# Allegro board 4PROJECT.brd
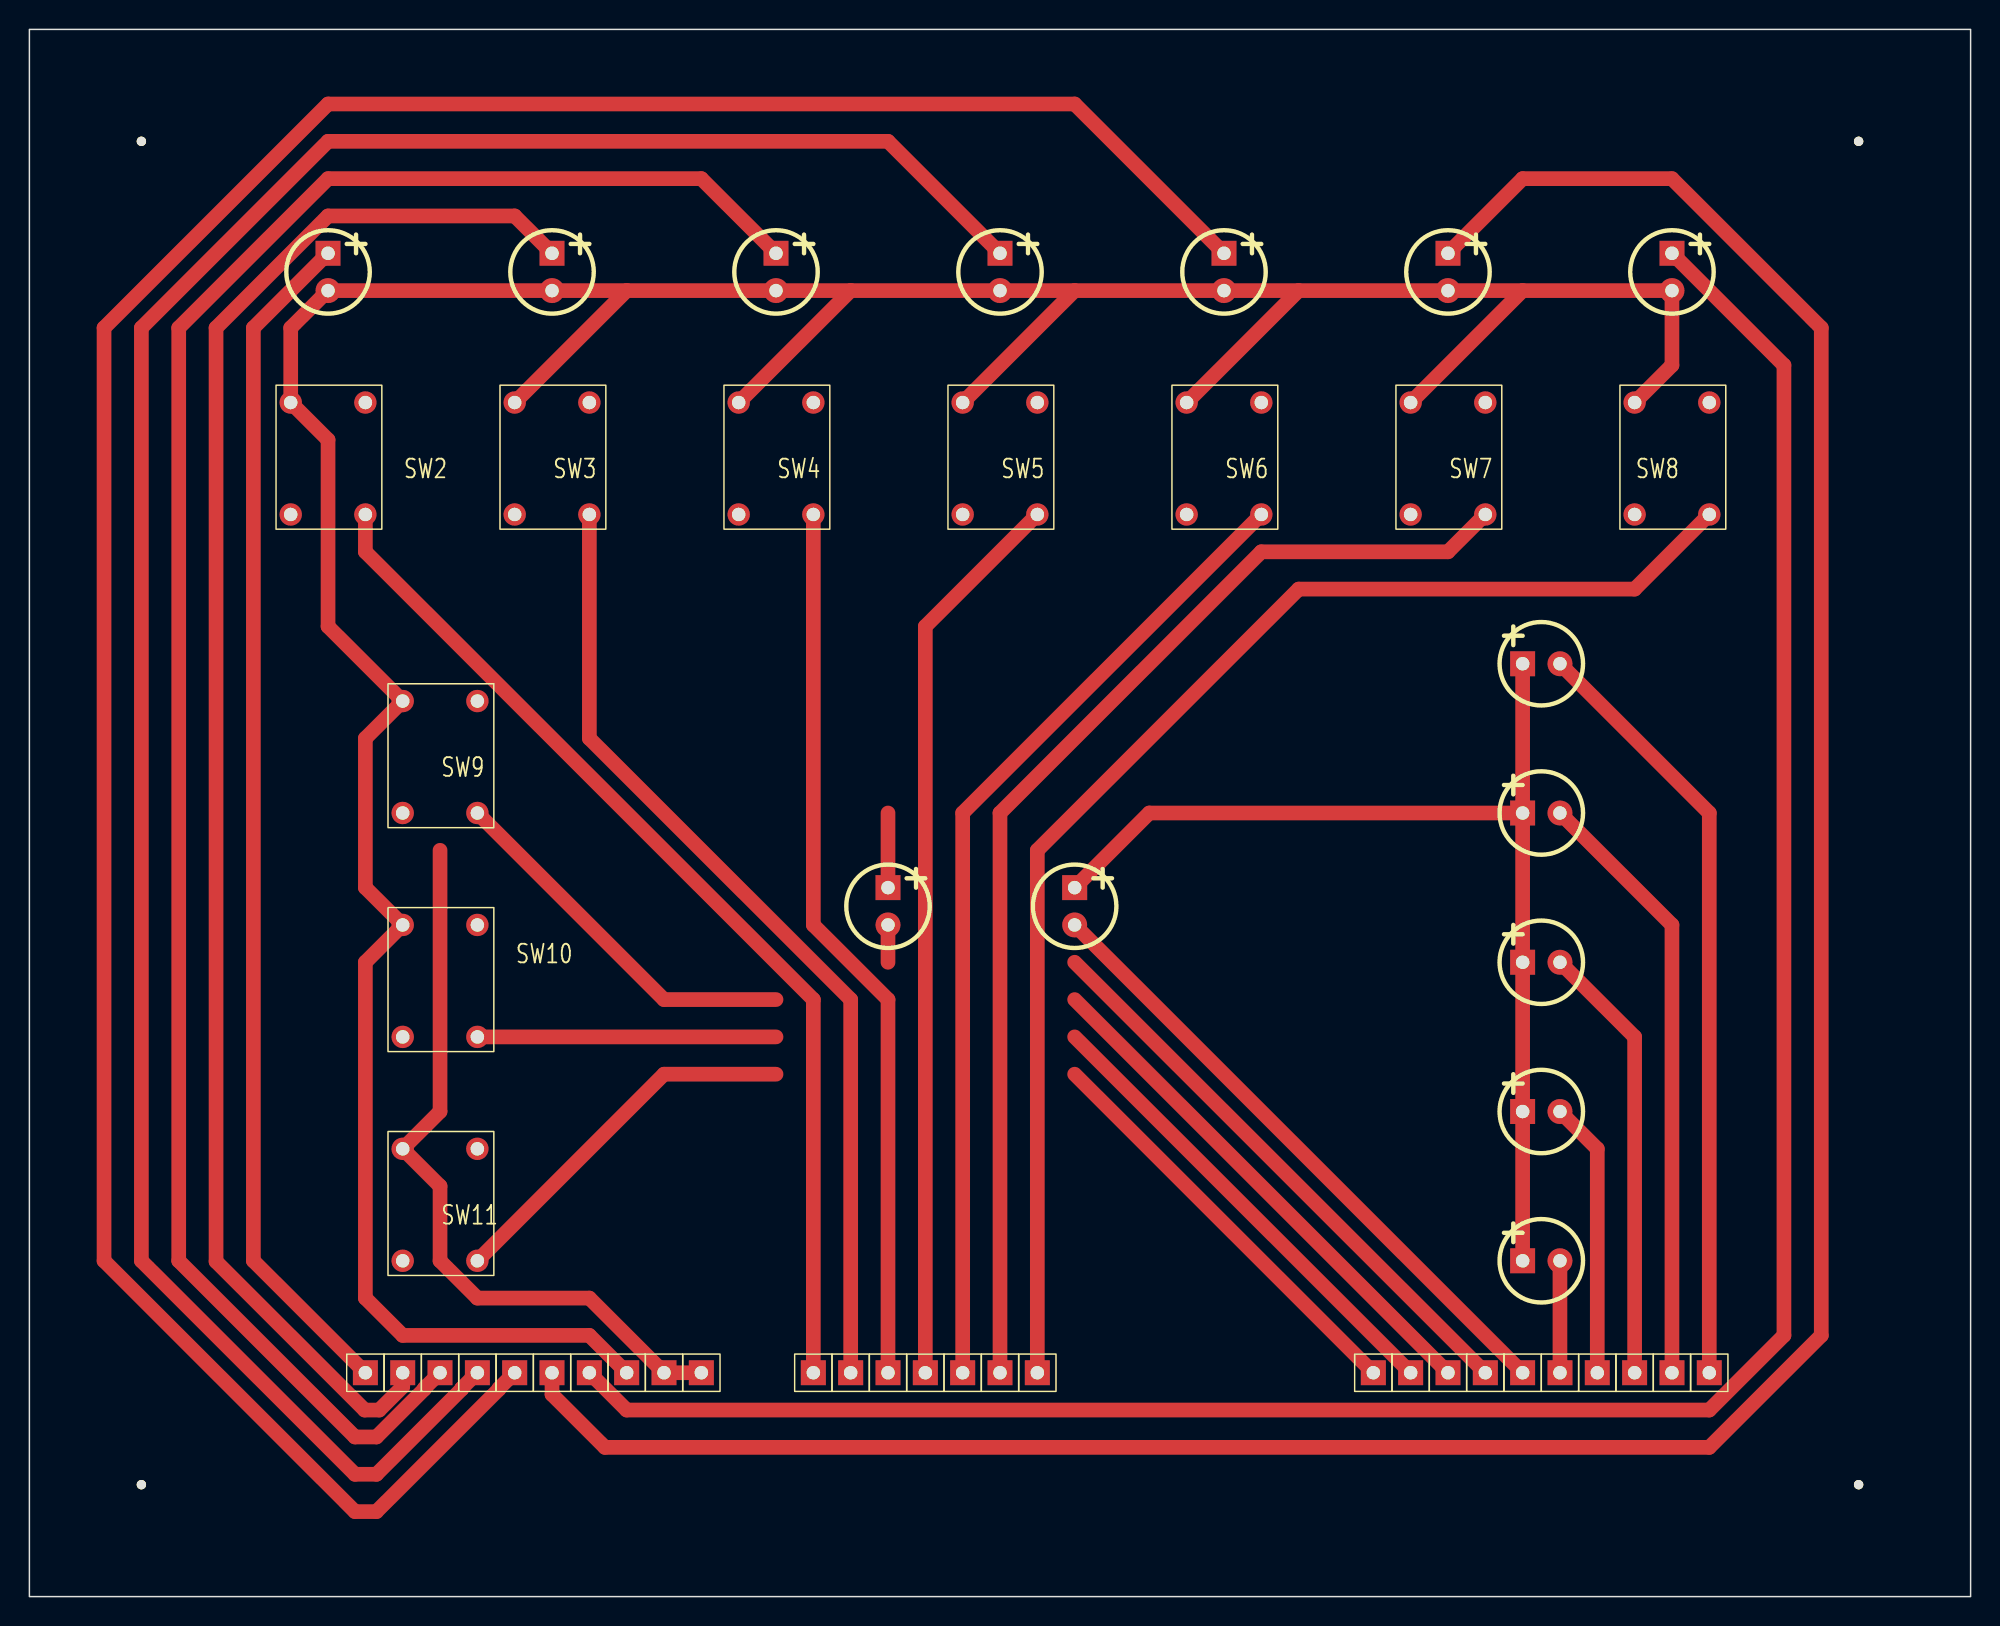
[diagram p0: board, top side]
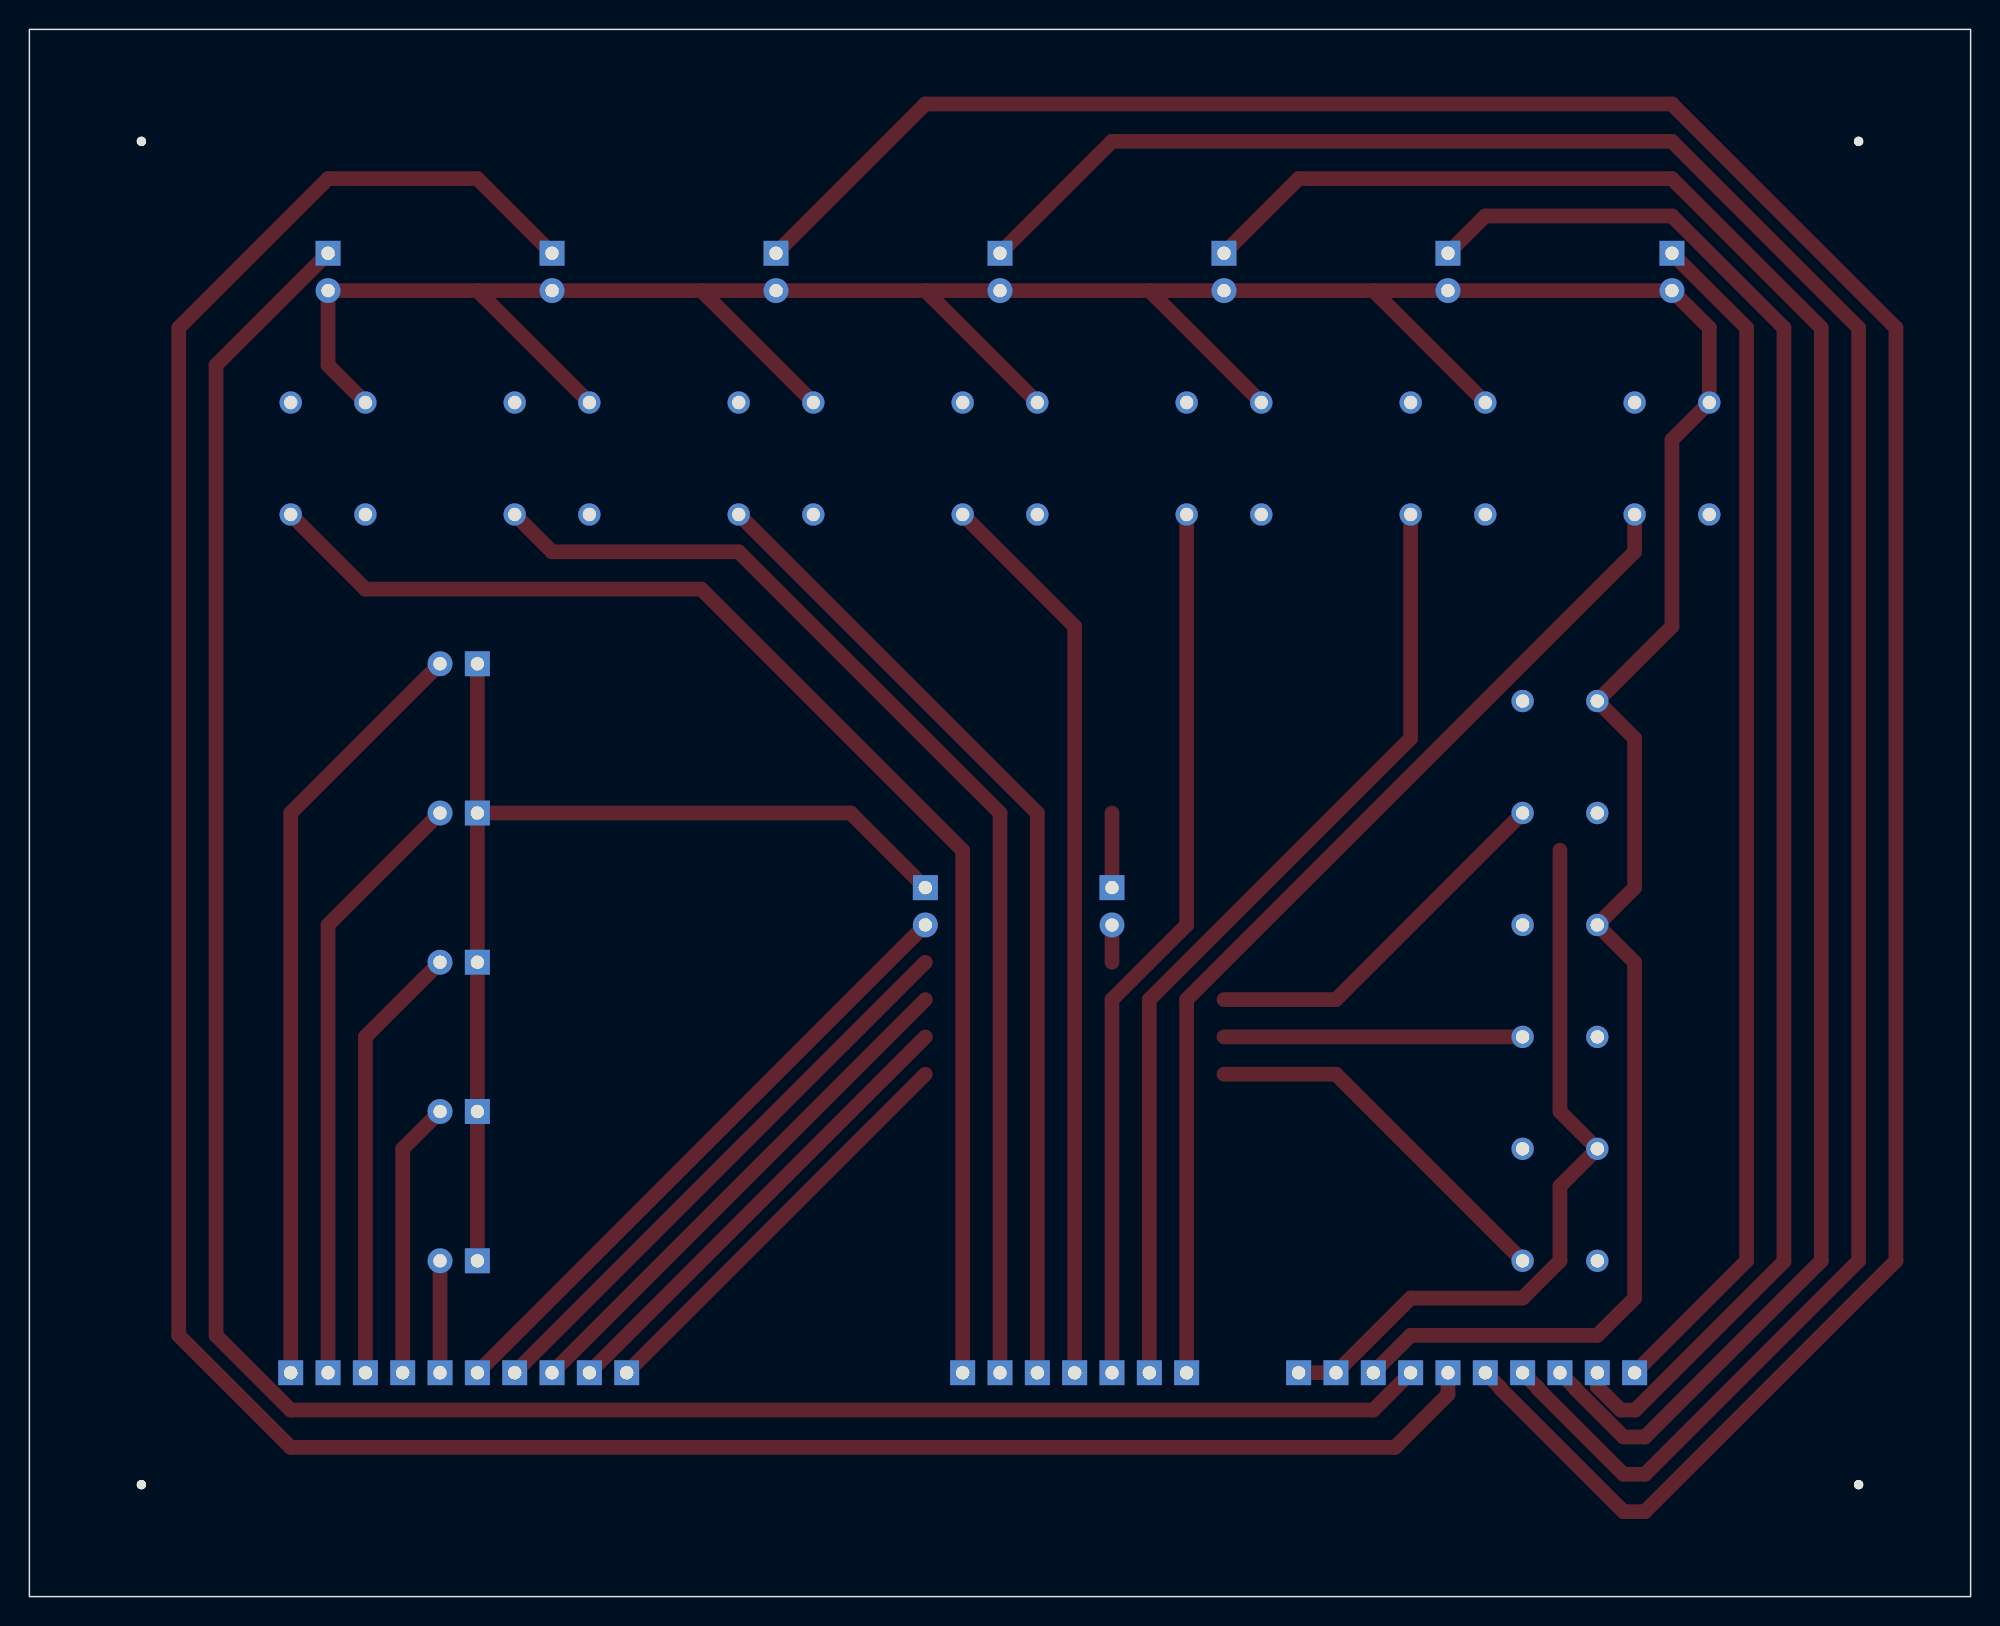
[diagram p1: board, bottom side, seen from below]

Outline 132.08 x 106.68 mm; copper layers: TOP, BOTTOM. Coordinates in mm from the lower left corner of the outline.
Outline path: rectangle 0,0 132.08,106.68

## Placement (name value [footprint] x y rotation side)
D1  LED  [CAP196]  20.32 91.44 0 top
D2  LED  [CAP196]  35.56 91.44 0 top
D3  LED  [CAP196]  50.8 91.44 0 top
D4  LED  [CAP196]  66.04 91.44 0 top
D5  LED  [CAP196]  81.28 91.44 0 top
D6  LED  [CAP196]  96.52 91.44 0 top
D7  LED  [CAP196]  111.76 91.44 0 top
D8  LED  [CAP196]  101.6 63.5 90 top
D9  LED  [CAP196]  101.6 53.34 90 top
D10  LED  [CAP196]  101.6 43.18 90 top
D11  LED  [CAP196]  101.6 33.02 90 top
D12  LED  [CAP196]  101.6 22.86 90 top
D13  LED  [CAP196]  71.12 48.26 0 top
D14  LED  [CAP196]  58.42 48.26 0 top
J1  CON1  [JUMPER1]  22.86 15.24 0 top
J2  CON1  [JUMPER1]  25.4 15.24 0 top
J3  CON1  [JUMPER1]  27.94 15.24 0 top
J4  CON1  [JUMPER1]  30.48 15.24 0 top
J5  CON1  [JUMPER1]  33.02 15.24 0 top
J6  CON1  [JUMPER1]  35.56 15.24 0 top
J7  CON1  [JUMPER1]  38.1 15.24 0 top
J8  CON1  [JUMPER1]  40.64 15.24 0 top
J9  CON1  [JUMPER1]  43.18 15.24 0 top
J10  CON1  [JUMPER1]  45.72 15.24 0 top
J11  CON1  [JUMPER1]  53.34 15.24 0 top
J12  CON1  [JUMPER1]  55.88 15.24 0 top
J13  CON1  [JUMPER1]  58.42 15.24 0 top
J14  CON1  [JUMPER1]  60.96 15.24 0 top
J15  CON1  [JUMPER1]  63.5 15.24 0 top
J16  CON1  [JUMPER1]  66.04 15.24 0 top
J17  CON1  [JUMPER1]  68.58 15.24 0 top
J21  CON1  [JUMPER1]  114.3 15.24 0 top
J22  CON1  [JUMPER1]  111.76 15.24 0 top
J23  CON1  [JUMPER1]  109.22 15.24 0 top
J24  CON1  [JUMPER1]  106.68 15.24 0 top
J25  CON1  [JUMPER1]  104.14 15.24 0 top
J26  CON1  [JUMPER1]  99.06 15.24 0 top
J27  CON1  [JUMPER1]  101.6 15.24 0 top
J28  CON1  [JUMPER1]  96.52 15.24 0 top
J29  CON1  [JUMPER1]  93.98 15.24 0 top
J30  CON1  [JUMPER1]  91.44 15.24 0 top
NOREF  -  [unnamed]  7.62 7.62 0 top
NOREF#2  -  [unnamed]  124.46 99.06 0 top
NOREF#3  -  [unnamed]  124.46 7.62 0 top
NOREF#4  -  [unnamed]  7.62 99.06 0 top
SW2  SW PUSHBUTTON  [4PSW]  17.78 73.66 0 top
SW3  SW PUSHBUTTON  [4PSW]  33.02 73.66 0 top
SW4  SW PUSHBUTTON  [4PSW]  48.26 73.66 0 top
SW5  SW PUSHBUTTON  [4PSW]  63.5 73.66 0 top
SW6  SW PUSHBUTTON  [4PSW]  78.74 73.66 0 top
SW7  SW PUSHBUTTON  [4PSW]  93.98 73.66 0 top
SW8  SW PUSHBUTTON  [4PSW]  109.22 73.66 0 top
SW9  SW PUSHBUTTON  [4PSW]  25.4 53.34 0 top
SW10  SW PUSHBUTTON  [4PSW]  25.4 38.1 0 top
SW11  SW PUSHBUTTON  [4PSW]  25.4 22.86 0 top

## Library data of the parts
D1-D14 = LED
J1-J17 J21-J30 = CON1_0: User Part Number: ***
SW2-SW11 = SW PUSHBUTTON_1

## Footprints (pads in the part's own frame, mm; a bottom-side part is the same pattern mirrored in y, then rotated)
4PSW
  round 1.524 hole 0.914: 1(0,0) 2(5.08,0) 3(0,7.62) 4(5.08,7.62)
CAP196
  rect 1.7x1.7 hole 0.914: 1(0,0)
  round 1.7 hole 0.91: 2(0,-2.54)
JUMPER1
  rect 1.7x1.7 hole 0.914: 1(0,0)
unnamed
  round 0.635 hole 3.175 unplated: (0,0)

## Nets
GND: D8.1(CATHODE) D9.1(CATHODE) D10.1(CATHODE) D11.1(CATHODE) D12.1(CATHODE) D13.1(CATHODE) D14.1(CATHODE) J9.1 J10.1 SW11.3
VCC: D1.2(ANODE) D2.2(ANODE) D3.2(ANODE) D4.2(ANODE) D5.2(ANODE) D6.2(ANODE) D7.2(ANODE) J8.1 SW2.3 SW3.3 SW4.3 SW5.3 SW6.3 SW7.3 SW8.3 SW9.3 SW10.3
50WON: J28.1 SW9.2
100WON: J29.1 SW10.2
D_OUT: D14.2(ANODE) J26.1
LED1: D1.1(CATHODE) J1.1
LED2: D2.1(CATHODE) J2.1
LED3: D3.1(CATHODE) J3.1
LED4: D4.1(CATHODE) J4.1
LED5: D5.1(CATHODE) J5.1
LED6: D6.1(CATHODE) J6.1
LED7: D7.1(CATHODE) J7.1
LED8: D8.2(ANODE) J21.1
LED9: D9.2(ANODE) J22.1
LED10: D10.2(ANODE) J23.1
LED11: D11.2(ANODE) J24.1
LED12: D12.2(ANODE) J25.1
M_OUT: D13.2(ANODE) J27.1
RST: J30.1 SW11.2
SW1: J11.1 SW2.2
SW2: J12.1 SW3.2
SW3: J13.1 SW4.2
SW4: J14.1 SW5.2
SW5: J15.1 SW6.2
SW6: J16.1 SW7.2
SW7: J17.1 SW8.2

Pads without a net: SW2 1 4; SW3 1 4; SW4 1 4; SW5 1 4; SW6 1 4; SW7 1 4; SW8 1 4; SW9 1 4; SW10 1 4; SW11 1 4

## Routing (per net, layer and track width the routed paths; a pad name or vN(x,y) marks a point on that pad's centre or on a via; arc(x,y) is an arc through that point)
GND: length 129.3
  TOP w1: D9.1 D8.1 ; D9.1 D10.1 D11.1 D12.1 ; D9.1 76.2,53.34 D13.1 ; 58.42,53.34 D14.1 ; J10.1 J9.1 38.1,20.32 30.48,20.32 27.94,22.86 27.94,27.94 SW11.3 27.94,33.02 27.94,50.8
VCC: length 249.8
  TOP w1: SW8.3 111.76,83.82 D7.2 101.6,88.9 ; 71.12,88.9 SW5.3 ; 71.12,88.9 D5.2 86.36,88.9 ; 71.12,88.9 D4.2 55.88,88.9 ; 55.88,88.9 D3.2 40.64,88.9 ; 55.88,88.9 SW4.3 ; 40.64,88.9 SW3.3 ; 40.64,88.9 D2.2 D1.2 17.78,86.36 SW2.3 20.32,78.74 20.32,66.04 SW9.3 22.86,58.42 22.86,48.26 SW10.3 22.86,43.18 22.86,20.32 25.4,17.78 38.1,17.78 J8.1 ; 86.36,88.9 D6.2 101.6,88.9 ; 86.36,88.9 SW6.3 ; 101.6,88.9 SW7.3
50WON: length 61.5
  TOP w1: 50.8,40.64 43.18,40.64 SW9.2 ; J28.1 71.12,40.64
100WON: length 52.6
  TOP w1: J29.1 71.12,38.1 ; SW10.2 50.8,38.1
D_OUT: length 42.1
  TOP w1: D14.2 58.42,43.18 ; J26.1 71.12,43.18
LED1: length 81.5
  TOP w1: D1.1 15.24,86.36 15.24,22.86 J1.1
LED2: length 109.1
  TOP w1: D2.1 33.02,93.98 20.32,93.98 12.7,86.36 12.7,22.81 22.81,12.7 23.8,12.7 25.4,14.29 J2.1
LED3: length 135
  TOP w1: D3.1 45.72,96.52 20.32,96.52 10.16,86.36 10.16,22.86 22.15,10.87 23.61,10.87 26.88,14.13 26.88,14.18 J3.1
LED4: length 162.1
  TOP w1: D4.1 58.42,99.06 20.32,99.06 7.62,86.36 7.62,22.86 22.15,8.33 23.61,8.33 29.42,14.13 29.42,14.18 J4.1
LED5: length 189.2
  TOP w1: D5.1 71.12,101.6 20.32,101.6 5.08,86.36 5.08,22.86 22.15,5.79 23.61,5.79 31.96,14.13 31.96,14.18 J5.1
LED6: length 192.8
  TOP w1: J6.1 35.56,13.76 39.16,10.16 114.3,10.16 121.92,17.78 121.92,86.36 111.76,96.52 101.6,96.52 D6.1
LED7: length 161.3
  TOP w1: J7.1 40.64,12.7 114.3,12.7 119.38,17.78 119.38,83.82 D7.1
LED8: length 52.5
  TOP w1: D8.2 114.3,53.34 J21.1
LED9: length 41.3
  TOP w1: J22.1 111.76,45.72 D9.2
LED10: length 30
  TOP w1: J23.1 109.22,38.1 D10.2
LED11: length 18.8
  TOP w1: D11.2 106.68,30.48 J24.1
LED12: length 7.6
  TOP w1: D12.2 J25.1
M_OUT: length 43.1
  TOP w1: J27.1 D13.2
RST: length 54.3
  TOP w1: SW11.2 43.18,35.56 50.8,35.56 ; J30.1 71.12,35.56
SW1: length 71
  TOP w1: SW2.2 22.86,71.12 53.34,40.64 J11.1
SW2: length 65.8
  TOP w1: J12.1 55.88,40.64 38.1,58.42 SW3.2
SW3: length 60.5
  TOP w1: J13.1 58.42,40.64 53.34,45.72 SW4.2
SW4: length 61.6
  TOP w1: SW5.2 60.96,66.04 J14.1
SW5: length 66.8
  TOP w1: SW6.2 63.5,53.34 J15.1
SW6: length 79.5
  TOP w1: SW7.2 96.52,71.12 83.82,71.12 66.04,53.34 J16.1
SW7: length 90.7
  TOP w1: SW8.2 109.22,68.58 86.36,68.58 68.58,50.8 J17.1
